# EAGLE board Motherboard (EAGLE 9.1.0)
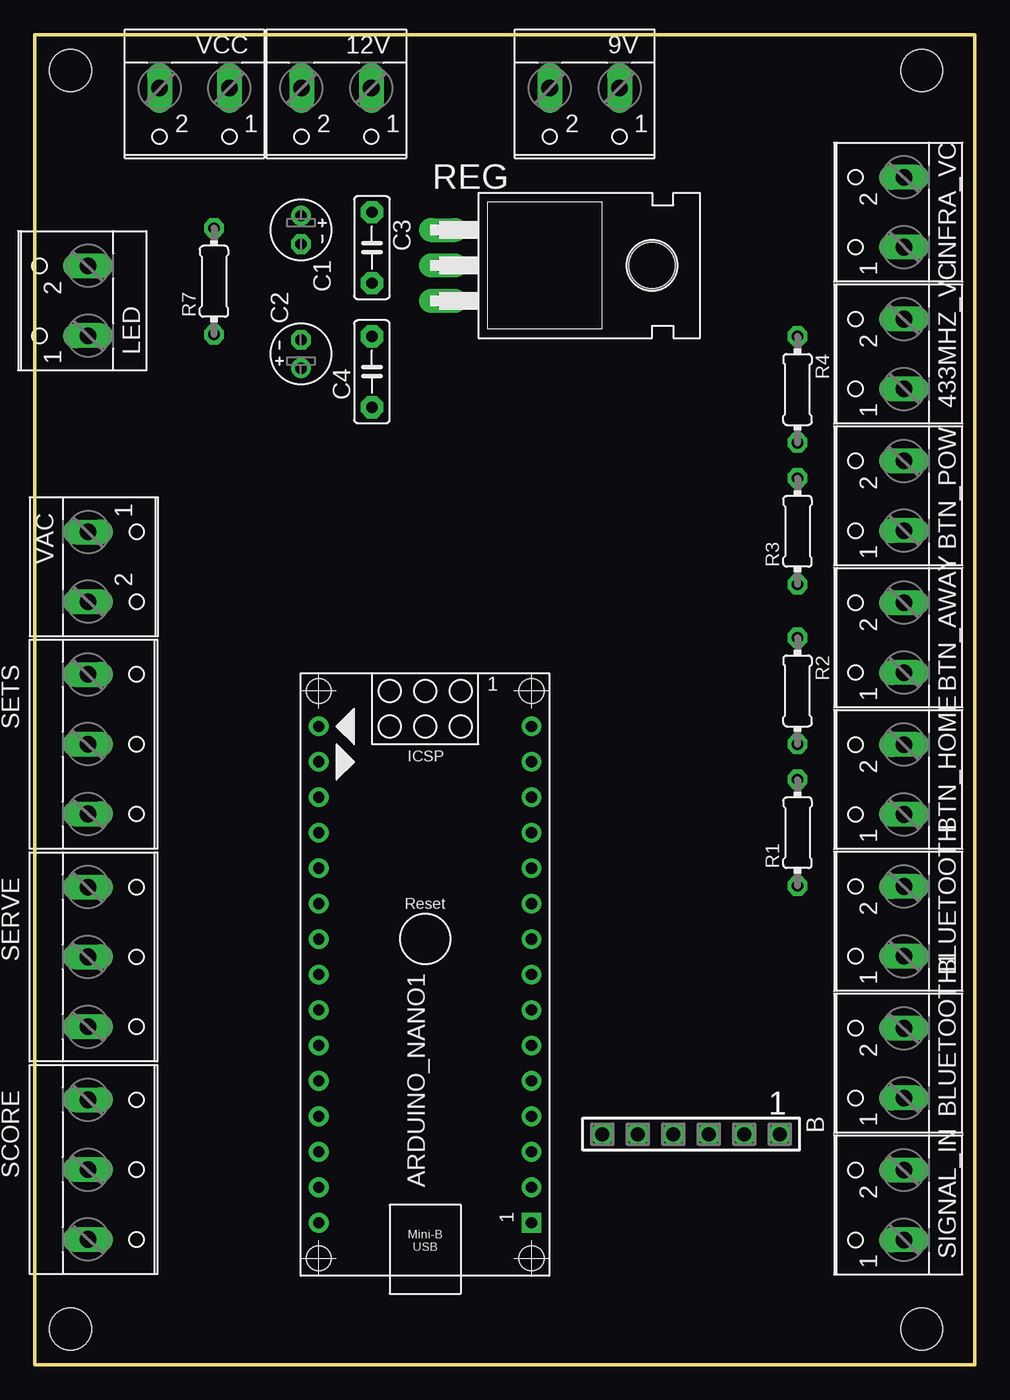
[diagram p0: board, top side]
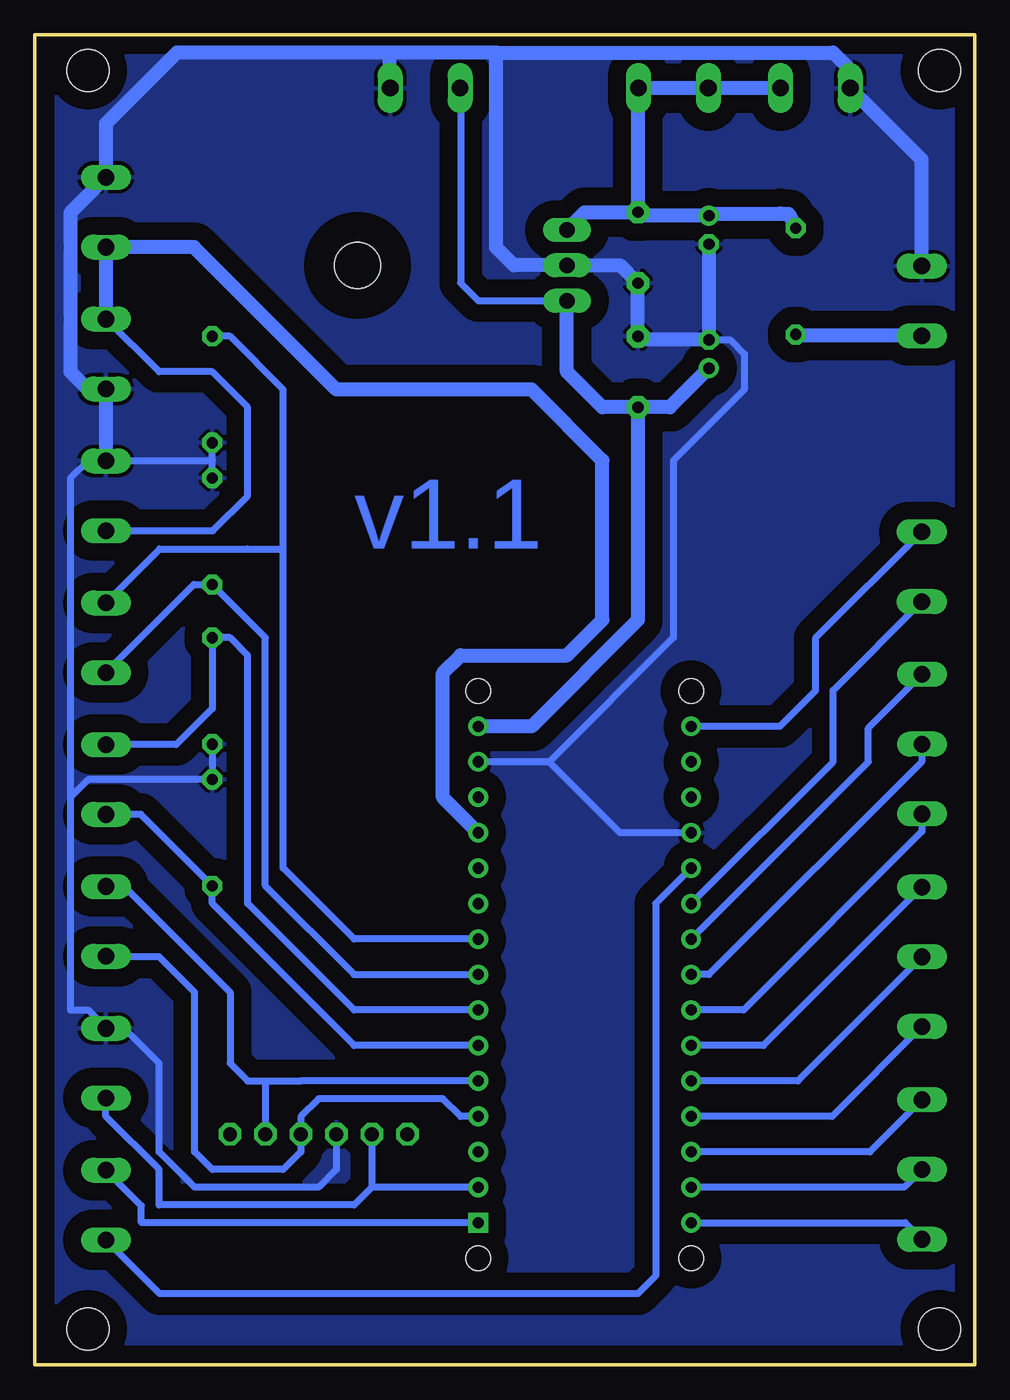
[diagram p1: board, bottom side, seen from below]

Size 67.31 x 95.25 mm. Coordinates in mm from the lower left corner, seen from the top.
Outline: 0,85.08 0,0
Outline: 0,0 0,95.25 67.31,95.25 67.31,0 0,0
Copper layers (1*16): Top 0.035mm / dielectric 1.5mm / Bottom 0.035mm
Design rules "SparkFun": minimum track width 8mil, minimum drill 20mil, track to track 8mil, track to pad 8mil, pad to pad 8mil, via to via 8mil, smd to smd 8mil, copper to edge 8mil, drill to drill 8mil, minimum pad ring 12mil, minimum via ring 10mil, stop-mask expansion 4mil, vias tented up to drill 20mil, thermal gap 10mil
Holes 3 mm at 2.54,2.54 2.54,92.71 63.5,2.54 63.5,92.71

## Footprints (pad centres in the part's own frame; a part is rotated, then mirrored left to right if it is on the bottom)
W237-102 = drill 1.194 long: 1 -2.5,-1.27; 2 2.5,-1.27
ARDUINO_NANO = drill 0.8 square: 1 -20.32,-7.62 | drill 0.8: 2 -17.78,-7.62; 3 -15.24,-7.62; 4 -12.7,-7.62; 5 -10.16,-7.62; 6 -7.62,-7.62; 7 -5.08,-7.62; 8 -2.54,-7.62; 9 0,-7.62; 10 2.54,-7.62; 11 5.08,-7.62; 12 7.62,-7.62; 13 10.16,-7.62; 14 12.7,-7.62; 15 15.24,-7.62; 16 15.24,7.62; 17 12.7,7.62; 18 10.16,7.62; 19 7.62,7.62; 20 5.08,7.62; 21 2.54,7.62; 22 0,7.62; 23 -2.54,7.62; 24 -5.08,7.62; 25 -7.62,7.62; 26 -10.16,7.62; 27 -12.7,7.62; 28 -15.24,7.62; 29 -17.78,7.62; 30 -20.32,7.62 | hole 1.778: -22.86,-7.62; -22.86,7.62; 17.78,7.62; 17.78,-7.62
SSW-106-02-G-S = drill 1 pad 1.5 octagon: 1 -6.35,0; 2 -3.81,0; 3 -1.27,0; 4 1.27,0; 5 3.81,0; 6 6.35,0
E2-4 = drill 0.813 pad 1.27: + -1.016,0 | drill 0.813 pad 1.27 octagon: - 1.016,0
C5B2.5 = drill 0.813 pad 1.6 octagon: 1 -2.54,0; 2 2.54,0
0204/7 = drill 0.813 octagon: 1 -3.81,0; 2 3.81,0
TO220H = drill 1.118 long: 1 -2.54,-10.16; 2 0,-10.16; 3 2.54,-10.16 | hole 3.302: 0,4.826
W237-103 = drill 1.194 long: 1 -5,-1.29; 2 0,-1.29; 3 5,-1.29

## Placement (x,y rotation side)
9V  [W237-102]  39.37,90.17 180 top
12V  [W237-102]  21.59,90.17 180 top
433MHZ_VC  [W237-102]  60.96,72.39 90 top
ARDUINO_NANO1  [ARDUINO_NANO]  27.94,30.48 90 top
B  SSW-106-02-G-S  [SSW-106-02-G-S]  46.99,16.51 180 top
BLUETOOTH  [W237-102]  60.96,31.75 90 top
BLUETOOTH1  [W237-102]  60.96,21.59 90 top
BTN_AWAY  [W237-102]  60.96,52.07 90 top
BTN_HOME  [W237-102]  60.96,41.91 90 top
BTN_POW  [W237-102]  60.96,62.23 90 top
C1  10u  [E2-4]  19.05,81.28 270 top
C2  47u  [E2-4]  19.05,72.39 90 top
C3  100n  [C5B2.5]  24.13,80.01 270 top
C4  100n  [C5B2.5]  24.13,71.12 90 top
INFRA_VC  [W237-102]  60.96,82.55 90 top
LED  [W237-102]  2.54,76.2 90 top
R1  10k  [0204/7]  54.61,38.1 90 top
R2  10k  [0204/7]  54.61,48.26 270 top
R3  10k  [0204/7]  54.61,59.69 90 top
R4  10k  [0204/7]  54.61,69.85 270 top
R7  470  [0204/7]  12.83,77.6 90 top
REG  LM7809  [TO220H]  39.37,78.74 270 top
SCORE  [W237-103]  5.08,13.97 270 top
SERVE  [W237-103]  5.08,29.21 270 top
SETS  [W237-103]  5.08,44.45 270 top
SIGNAL_IN  [W237-102]  60.96,11.43 90 top
VAC  [W237-102]  5.08,57.15 270 top
VCC  [W237-102]  11.43,90.17 180 top

## Library data of the parts
9V 12V 433MHZ_VC BLUETOOTH BLUETOOTH1 BTN_AWAY BTN_HOME BTN_POW INFRA_VC LED SIGNAL_IN VAC VCC = con-wago-500; MPN: 237-102; OC_FARNELL: unknown; OC_NEWARK: 70K9898
ARDUINO_NANO1 = ArduinoNanoV30
B = con-samtec; MF: Samtec Inc.; MPN: SSW-106-02-G-S; OC_FARNELL: unknown; OC_NEWARK: 11P9416
C1 C2 = rcl; SPICEPREFIX: C
C3 C4 = capacitor-wima
R1-R4 R7 = resistor
REG = linear
SCORE SERVE SETS = con-wago-500; MPN: 237-103; OC_FARNELL: unknown; OC_NEWARK: 18M7116

## Nets
3V3: ARDUINO_NANO1.2 B.5 BLUETOOTH1.1
12V: 12V.1 12V.2 C1.+ C3.1 R7.2 REG.1 VCC.1
433MHZ: ARDUINO_NANO1.20 SIGNAL_IN.1
A2: ARDUINO_NANO1.6 BTN_HOME.1 R1.1
A3: ARDUINO_NANO1.7 BTN_HOME.2 R2.1
A4: ARDUINO_NANO1.8 BTN_AWAY.1 R3.1
A5: ARDUINO_NANO1.9 BTN_AWAY.2 R4.1
GND: 9V.1 433MHZ_VC.1 ARDUINO_NANO1.14 ARDUINO_NANO1.19 B.4 BLUETOOTH1.2 BTN_POW.2 C1.- C2.- C3.2 C4.2 INFRA_VC.2 LED.2 R1.2 R2.2 R3.2 R4.2 REG.2 VCC.2
INFRA: ARDUINO_NANO1.1 SIGNAL_IN.2
N$5: ARDUINO_NANO1.21 VAC.2
N$6: ARDUINO_NANO1.16 VAC.1
N$7: LED.1 R7.1
RXD: ARDUINO_NANO1.5 B.2 BLUETOOTH.2
SCORE_1: ARDUINO_NANO1.28 SCORE.1
SCORE_2: ARDUINO_NANO1.29 SCORE.2
SCORE_3: ARDUINO_NANO1.30 SCORE.3
SERVE_1: ARDUINO_NANO1.25 SERVE.1
SERVE_2: ARDUINO_NANO1.26 SERVE.2
SERVE_3: ARDUINO_NANO1.27 SERVE.3
SETS_1: ARDUINO_NANO1.22 SETS.1
SETS_2: ARDUINO_NANO1.23 SETS.2
SETS_3: ARDUINO_NANO1.24 SETS.3
TXD: ARDUINO_NANO1.4 B.3 BLUETOOTH.1
VCC: 433MHZ_VC.2 ARDUINO_NANO1.12 BTN_POW.1 INFRA_VC.1
VIN_9V: 9V.2 ARDUINO_NANO1.15 C2.+ C4.1 REG.3

## Tracks (layer width: path | path; a pad name or v marks a point on that pad's centre or on a via)
3V3
  Bottom 0.508: ARDUINO_NANO1.2 43.18,12.7 | 43.18,12.7 44.45,11.43 58.42,11.43 58.42,13.97 62.23,17.78 BLUETOOTH1.1 | B.5 43.18,12.7
12V
  Bottom 1.016: R7.2 13.34,82.42 13.97,82.42 | 13.97,82.42 18.92,82.42 C1.+ 23.88,82.3 C3.1 | REG.1 27.94,82.55 C3.1 | 13.93,82.46 13.97,82.42 | VCC.1 12V.2 12V.1 24.13,91.4 C3.1
433MHZ
  Bottom 0.508: ARDUINO_NANO1.20 22.86,33.02 22.86,6.35 24.13,5.08 58.38,5.08 SIGNAL_IN.1
A2
  Bottom 0.508: BTN_HOME.1 59.73,39.41 R1.1 54.61,33.02 44.45,22.86 ARDUINO_NANO1.6
A3
  Bottom 0.508: ARDUINO_NANO1.7 44.45,25.4 52.07,33.02 52.07,50.8 53.34,52.07 R2.1 54.61,46.99 57.19,44.41 BTN_HOME.2
A4
  Bottom 0.508: ARDUINO_NANO1.8 44.45,27.94 50.8,34.29 50.8,52.07 R3.1 55.92,55.88 BTN_AWAY.1
A5
  Bottom 0.508: ARDUINO_NANO1.9 44.45,30.48 49.53,35.56 49.53,54.61 49.53,58.42 | 49.53,58.42 49.53,69.85 53.34,73.66 R4.1 | BTN_AWAY.2 58.38,58.42 52.07,58.42 49.53,58.42
GND
  Bottom 0.254: BTN_POW.2 62.23,64.57
  Bottom 0.508: 30.48,43.18 ARDUINO_NANO1.14 | C2.- 17.53,73.41 16.51,72.39 16.51,69.85 21.59,64.77 21.59,52.07 30.48,43.18 | B.4 45.72,13.97 46.99,12.7 55.88,12.7 58.42,15.24 58.42,21.59 60.96,24.13 62.19,24.13 62.21,24.11 | 62.21,24.11 BLUETOOTH1.2 | ARDUINO_NANO1.19 25.4,38.1 30.48,43.18 | R2.2 54.61,43.18 R1.2 63.5,41.91 64.77,40.64 | 64.77,40.64 64.77,25.4 63.5,25.4 62.21,24.11 | R3.2 54.61,64.77 | 54.61,64.77 R4.2 | 64.77,40.64 64.77,63.5 63.54,64.73 BTN_POW.2 54.65,64.73 54.61,64.77
  Bottom 1.016: 34.29,93.98 34.29,80.01 33.02,78.74 REG.2 25.4,78.74 C3.2 C4.2 23.88,73.41 C2.- C1.- | 34.29,93.98 10.16,93.98 8.89,92.71 8.93,92.67 VCC.2 3.81,86.32 LED.2 | 34.29,93.98 41.91,93.98 | 41.91,93.98 57.15,93.98 62.23,88.9 INFRA_VC.2 64.77,82.51 64.77,71.12 63.5,69.85 62.27,69.85 433MHZ_VC.1 BTN_POW.2 | 9V.1 41.91,91.48 41.91,93.98
  pour Bottom (isolate 1.27): -2.54,-1.27 69.85,-1.27 69.85,0 69.85,96.52 -2.54,96.52
INFRA
  Bottom 0.508: ARDUINO_NANO1.1 59.69,10.16 59.69,11.39 SIGNAL_IN.2
N$5
  Bottom 0.508: ARDUINO_NANO1.21 10.16,43.18 10.16,48.3 VAC.2
N$6
  Bottom 0.508: VAC.1 11.43,52.03 11.43,48.26 13.97,45.72 ARDUINO_NANO1.16
N$7
  Bottom 1.016: LED.1 12.74,73.7 R7.1
RXD
  Bottom 0.508: ARDUINO_NANO1.5 48.26,20.32 50.8,20.32 | 50.8,20.32 B.2 | BLUETOOTH.2 60.92,34.25 53.34,26.67 53.34,21.59 52.07,20.32 50.8,20.32
SCORE_1
  Bottom 0.508: SCORE.1 7.52,15.24 ARDUINO_NANO1.28
SCORE_2
  Bottom 0.508: SCORE.2 5.06,12.7 ARDUINO_NANO1.29
SCORE_3
  Bottom 0.508: ARDUINO_NANO1.30 4.98,10.16 SCORE.3
SERVE_1
  Bottom 0.508: SERVE.1 15.14,22.86 ARDUINO_NANO1.25
SERVE_2
  Bottom 0.508: SERVE.2 12.68,20.32 ARDUINO_NANO1.26
SERVE_3
  Bottom 0.508: SERVE.3 10.22,17.78 ARDUINO_NANO1.27
SETS_1
  Bottom 0.508: ARDUINO_NANO1.22 7.62,43.18 7.62,45.62 SETS.1
SETS_2
  Bottom 0.508: SETS.2 3.81,44.43 3.81,43.18 19.05,27.94 ARDUINO_NANO1.23
SETS_3
  Bottom 0.508: ARDUINO_NANO1.24 16.57,25.4 3.79,38.18 SETS.3
TXD
  Bottom 0.508: ARDUINO_NANO1.4 36.83,17.78 38.1,19.05 46.99,19.05 48.26,17.78 B.3 48.26,15.24 49.53,13.97 54.61,13.97 55.88,15.24 55.88,26.67 58.42,29.21 62.19,29.21 BLUETOOTH.1
VCC
  Bottom 0.508: BTN_POW.1 54.57,59.73 52.07,62.23 52.07,68.58 54.61,71.12 58.42,71.12 62.19,74.89 433MHZ_VC.2
  Bottom 1.016: ARDUINO_NANO1.12 38.1,40.64 38.1,49.53 36.83,50.8 29.21,50.8 26.67,53.34 26.67,64.77 31.75,69.85 45.72,69.85 55.92,80.05 INFRA_VC.1 433MHZ_VC.2
VIN_9V
  Bottom 0.508: 9V.2 36.83,91.4 36.83,77.47 35.56,76.2 REG.3
  Bottom 1.016: ARDUINO_NANO1.15 31.75,45.72 24.13,53.34 C4.1 | C2.+ 21.84,68.58 C4.1 | C4.1 26.67,68.58 29.21,71.12 REG.3

## Text on the board
Bottom: v1.1